# Altium PCB STN1110_RN-42.PcbDoc
Units mil, origin at the board's own origin, x right, y up, seen from the top; angles counter-clockwise.
Board outline 688.98 x 1476.57 mil, 2 copper layers (Top Layer, Bottom Layer), stack 63.4 mil thick; 32 components, 32 nets, 128 pads, 42 vias.
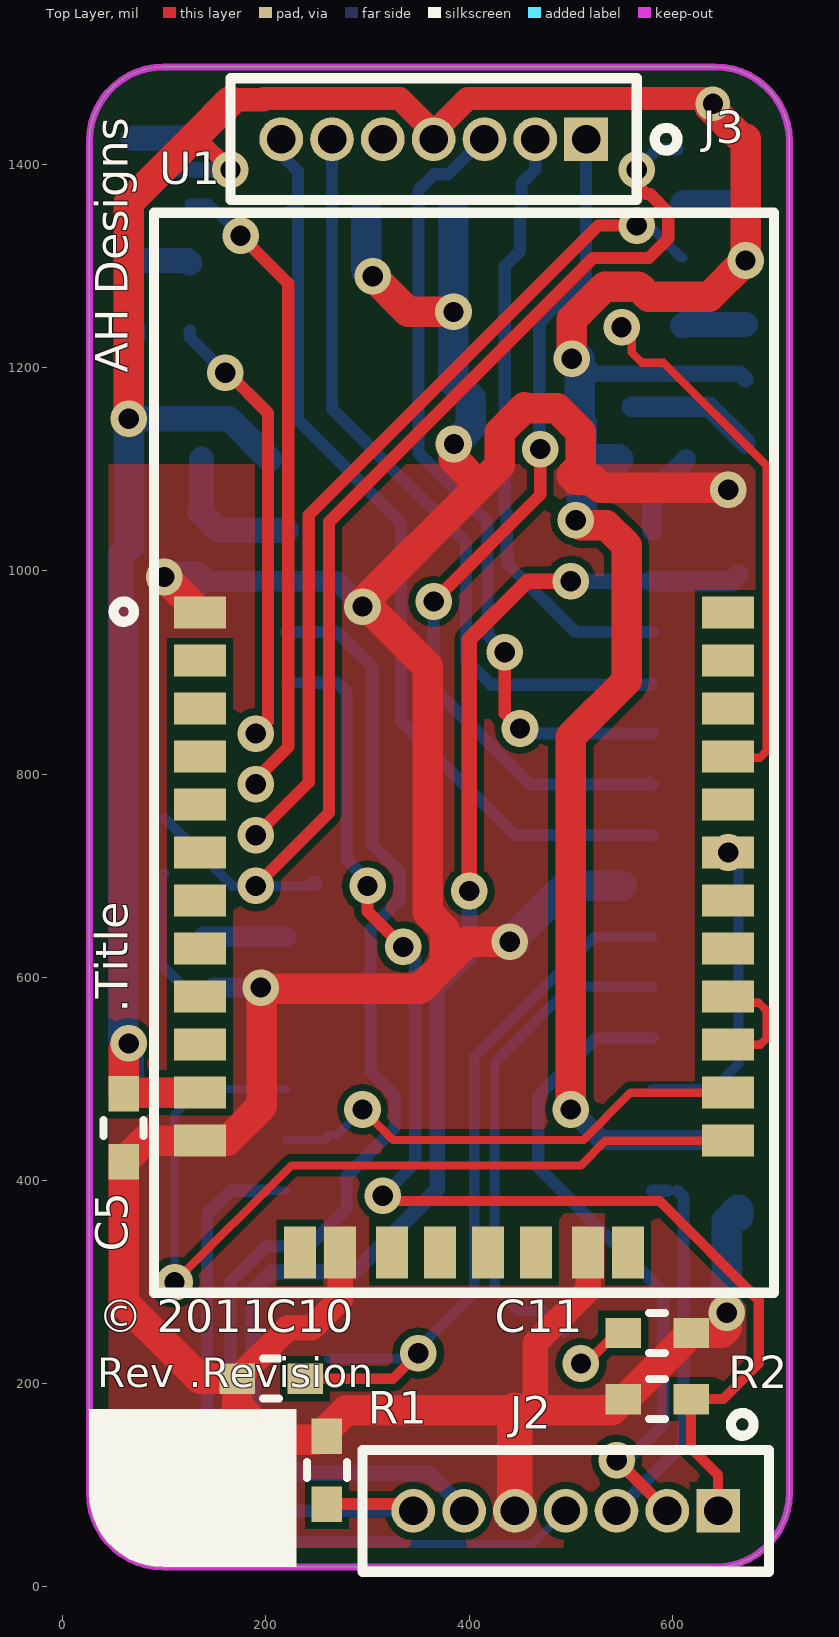
[diagram p0: Top Layer view]
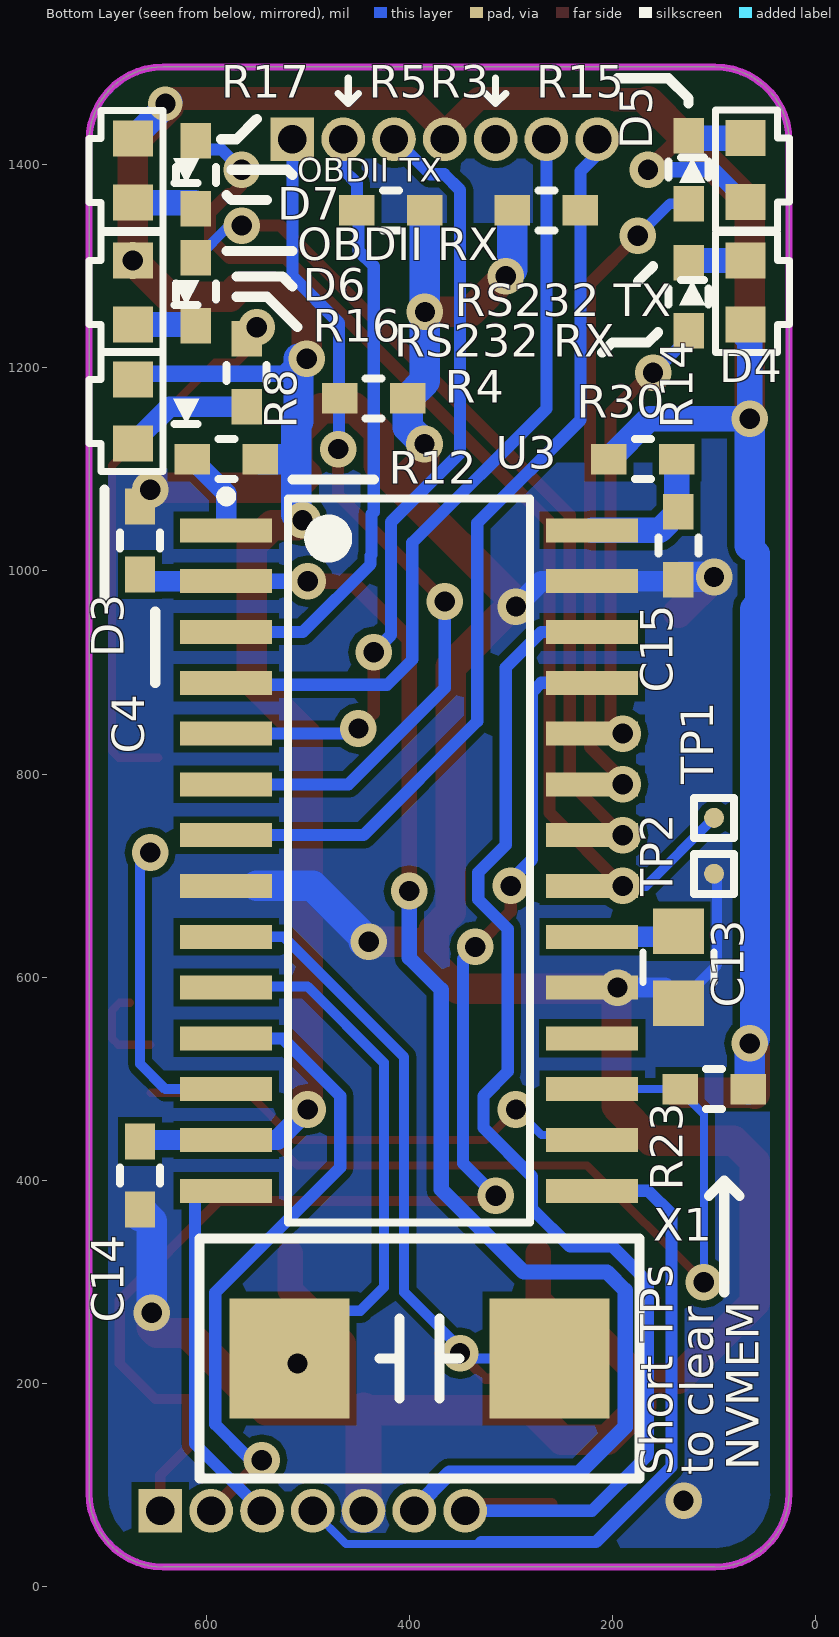
[diagram p1: Bottom Layer view, seen from below]

## Layer stack, top to bottom
Top Layer: signal copper 0.7
Dielectric: core 62, FR-408, Dk 3.81
Bottom Layer: signal copper 0.7

## Board outline
26.18,92.52 ccw(c99.11,92.52) 99.11,19.59 99.11,19.68 642.22,19.68 642.22,19.59 ccw(c642.22,92.52) 715.16,92.52 715.16,1423.23 ccw(c642.22,1423.23) 642.22,1496.16 642.22,1496.06 99.11,1496.06 ccw(c99.11,1423.13) 26.18,1423.13

## Design rules (kind name [scope] priority, off if disabled: settings)
AcuteAngle [All] p1: minimum=6.00000000000000E+0001
Clearance Clearance_outline [OnLayer('Top Layer') or OnLayer('Bottom Layer') or IsVia vs OnLayer('Keep-Out Layer')] p1: gap=15
Clearance [All] p2: gap=7
ComponentClearance [All] p1: gap=6 collisioncheckmode=3 verticalgap=6 showdistances=FALSE
ComponentOrientations [All] p1: allowedrotations=27
DiffPairsRouting [All] p1: maxlimit=10 minlimit=5 mostfreqgap=7 maxuncoupledlength=250
FabricationTestPointUsage TestPointUsage [All] p1: valid=2 allowmultiple=TRUE
FabricationTestpoint Testpoint [All] p1: side=3 testpointundercomponent=FALSE minsize=40 maxsize=100 preferedsize=60 minholesize=0 maxholesize=40 preferedholesize=32 testpointgrid=1 allowsidetop=TRUE allowsidebottom=TRUE usegrid=TRUE gridtolerance=0.01
Height [All] p1: minheight=0 maxheight=1500 prefheight=500
HoleSize [All] p1: absolutevalues=TRUE maxlimit=500 minlimit=20 maxpercent=80.000 minpercent=20.000
MinimumAnnularRing [All] p1: minimumring=7
MinimumSolderMaskSliver [All] p1: minsoldermaskwidth=4
PermittedLayers [All] p1: toplayerpermitted=TRUE bottomlayerpermitted=TRUE
PlaneConnect PlaneConnect_Vias [IsVia] p1: planeconnectstyle=Direct reliefexpansion=20 reliefentries=4 reliefconductorwidth=10 reliefairgap=10
PlaneConnect [All] p2: planeconnectstyle=Relief reliefexpansion=20 reliefentries=4 reliefconductorwidth=15 reliefairgap=15
PolygonConnect PolygonConnect_Vias [IsVia] p1: connectstyle=Direct reliefconductorwidth=10 reliefentries=4 polygonreliefangle="90 Angle"
PolygonConnect [All] p2: connectstyle=Direct reliefconductorwidth=10 reliefentries=4 polygonreliefangle="90 Angle"
RoomDefinition STN1110_RN-42 [InComponentClass('STN1110_RN-42')] p1: confinementstyle=ConfineIn formatcopy=TRUE lockcomponents=FALSE outline 15,0 725,0 725,1500 15,1500
RoutingTopology RoutingTopology_Bottom [OnLayer('Bottom Layer')] p1: topology=Vertical
RoutingTopology RoutingTopology_Mid4 [OnLayer('Mid-Layer 4')] p2: topology=Horizontal
RoutingTopology RoutingTopology_Mid3 [OnLayer('Mid-Layer 3')] p3: topology=Vertical
RoutingTopology RoutingTopology_Mid2 [OnLayer('Mid-Layer 2')] p4: topology=Horizontal
RoutingTopology RoutingTopology_Mid1 [OnLayer('Mid-Layer 1')] p5: topology=Vertical
RoutingTopology RoutingTopology_Top [OnLayer('Top Layer')] p6: topology=Horizontal
RoutingVias [All] p1: holewidth=20 width=36 viastyle="Through Hole" minholewidth=20 minwidth=34 maxholewidth=100 maxwidth=300
SilkToSilkClearance [IsText] p1: silktosilkclearance=0
SilkscreenOverComponentPads [IsText] p1: minsilkscreentomaskgap=3
SolderMaskExpansion [All] p1: expansion=3
ViasUnderSMD [All] p1: allowed=TRUE
Width [All] p1: maxlimit=150 minlimit=8 preferedwidth=12 minimp=50.000000 maximp=50.000000 favimp=50.000000
17 further rules are at their usual default settings.

## Components (designator, comment, footprint, x,y, rotation, side; value= is the part's Value field where it differs from the comment)
C4 "0.1uF" CC0603 665,1030 r270 bottom
C5 "0.1uF" CC0603 60,452 r270 top
C10 "33pF" CC0603 205,205 r0 top
C11 "33pF" CC0603 585,250 r180 top
C13 "10uF" CC0805 135,610 r270 bottom
C14 "0.1uF" CC0603 665,405 r270 bottom
C15 "0.1uF" CC0603 135,1025 r270 bottom
D3 "APA1606SECK" KINGBRIGHT_APA1606SECK 672,1157 r270 bottom
D4 "APA1606SECK" KINGBRIGHT_APA1606SECK 69,1274.08 r90 bottom
D5 "APA1606SECK" KINGBRIGHT_APA1606SECK 69,1394.5 r90 bottom
D6 "APA1606SECK" KINGBRIGHT_APA1606SECK 672,1274.08 r270 bottom
D7 "APA1606SECK" KINGBRIGHT_APA1606SECK 672,1394.08 r270 bottom
J2 "TMS-107-02-G-S" Samtec_TMS-107-02-G-S 495,75 r180 top locked
J3 "TMS-107-02-G-S" Samtec_TMS-107-02-G-S 365,1425 r180 top locked
R1 "10.0K" R0603 260,115 r90 top
R2 "10.0K" R0603 585,185 r180 top
R3 "10.0K" R0603 265,1355 r0 bottom
R4 "10.0K" R0603 435,1170 r180 bottom
R5 "10.0K" R0603 418,1355 r180 bottom
R8 "1.00K" R0603 560,1195 r270 bottom
R12 "10.0K" R0603 580,1110 r180 bottom
R14 "1.00K" R0603 125,1270 r270 bottom
R15 "1.00K" R0603 125,1395 r270 bottom
R16 "1.00K" R0603 610,1275 r90 bottom
R17 "1.00K" R0603 610,1390 r90 bottom
R23 "1.00K" R0603 100,490 r180 bottom
R30 "10.0" R0603 170,1110 r180 bottom
TP1 "Name" TP,0.5mmx0.5mm,RND 100,757 r90 bottom
TP2 "Name" TP,0.5mmx0.5mm,RND 100,702 r90 bottom
U1 "RN-42" RN-42 395,644 r0 top locked
U3 "STN1110" SOIC127P1030X264-28N 400,715 r180 bottom locked
X1 "ABM2-16.000MHZ-D4Y-T" Abracon_ABM2_Series 390,225 r180 bottom

## Footprints (in the part's own frame and the unit in brackets; to place one, negate y for a bottom-side part, rotate by r counter-clockwise, add the part's x,y. Pads: shape width x height; smd on the part's side, far side on the other; paste and mask are expansions set on the pad)
Abracon_ABM2_Series [mm] "Abracon ABM2 series crystal footprint"
  rect 3x3 smd: 1(-3.25,0) 2(3.25,0)
  silkscreen extent -5.5,-3 5.5,3, body extent -4,-2.25 4,2.25, height 1.4
CC0603 [mil] "Chip Capacitor, Body 1.6x0.8mm, IPC Medium Density"
  rect 35x30 smd: 1(-33.46,0) 2(33.46,0)
  silkscreen extent -8,-20 8,20, body extent -33,-19 33,19, height 24
CC0805 [mil] "Chip Capacitor, Body 2.0x1.3mm, IPC Medium Density"
  rect 45x50 smd: 1(-35.43,0) 2(35.43,0)
  silkscreen extent -15,-35 15,35, body extent -42,-28 42,28, height 26
KINGBRIGHT_APA1606SECK [mm] "Kingbright Right-Angle LED footprint (0605)"
  rect 0.9x1 smd: A(-0.8,0) C(0.8,0)
  silkscreen extent -1.5,-1.1 1.5,1.66, body extent -0.8,-0.9 0.8,0.3, height 0.6
R0603 [mil] "Chip Resistor, 2-Leads, Body 1.7x0.8mm, IPC High Density"
  rect 35x30 smd: 1(-33.46,0) 2(33.46,0)
  silkscreen extent -8,-20 8,20, body extent -33,-19 33,19, height 24
RN-42 [mm] "Roving Networks RN-42 module footprint"
  rect 1.3x0.8 smd: 1(-6.6,8) 2(-6.6,6.8) 3(-6.6,5.6) 4(-6.6,4.4) 5(-6.6,3.2) 6(-6.6,2) 7(-6.6,0.8) 8(-6.6,-0.4) 9(-6.6,-1.6) 10(-6.6,-2.8) 11(-6.6,-4) 12(-6.6,-5.2) 13(6.6,-5.2) 14(6.6,-4) 15(6.6,-2.8) 16(6.6,-1.6) 17(6.6,-0.4) 18(6.6,0.8) 19(6.6,2) 20(6.6,3.2) 21(6.6,4.4) 22(6.6,5.6) 23(6.6,6.8) 24(6.6,8)
  rect 0.8x1.3 smd: 28(3.1,-8) 29(-3.1,-8) 30(4.1,-8) 31(1.8,-8) 32(0.6,-8) 33(-0.6,-8) 34(-1.8,-8) 35(-4.1,-8)
  Top Layer pour cut-out: 6.75,11.75 6.75,17.75 -6.75,17.75 -6.75,11.75
  Bottom Layer pour cut-out: 6.75,11.75 6.75,17.75 -6.75,17.75 -6.75,11.75
  silkscreen extent -8.76,-9 7.75,18, body extent -6.96,-8.36 6.96,17.6, height 2
Samtec_TMS-107-02-G-S [mil] "CONN HEADER .050\" 7POS PCB GOLD"
  rect 43x43 hole 28: 1(-150,0)
  round 43 hole 28: 2(-100,0) 3(-50,0) 4(0,0) 5(50,0) 6(100,0) 7(150,0)
  silkscreen extent -200,-96 200,60, body extent -182,-44 182,44, height 205
SOIC127P1030X264-28N [mm] "SOIC, 28-Leads, Body 18.1x7.6mm (max), Pitch 1.27mm, IPC Medium Density"
  rect 2.3x0.6 smd: 1(-4.575,8.255) 2(-4.575,6.985) 3(-4.575,5.715) 4(-4.575,4.445) 5(-4.575,3.175) 6(-4.575,1.905) 7(-4.575,0.635) 8(-4.575,-0.635) 9(-4.575,-1.905) 10(-4.575,-3.175) 11(-4.575,-4.445) 12(-4.575,-5.715) 13(-4.575,-6.985) 14(-4.575,-8.255) 15(4.575,-8.255) 16(4.575,-6.985) 17(4.575,-5.715) 18(4.575,-4.445) 19(4.575,-3.175) 20(4.575,-1.905) 21(4.575,-0.635) 22(4.575,0.635) 23(4.575,1.905) 24(4.575,3.175) 25(4.575,4.445) 26(4.575,5.715) 27(4.575,6.985) 28(4.575,8.255)
  silkscreen extent -4.7,-9.05 3.03,9.23, body extent -3.79,-9.04 3.8,9.04, height 2.64
TP,0.5mmx0.5mm,RND [mm] "0.5x0.5 SMT test point."
  round 0.5 smd: 1(0,0)
  silkscreen extent -0.5,-0.5 0.5,0.5, body extent -0.5,-0.5 0.5,0.5, height 5

## Part data
C4 C5 C14 C15: library part 0.1uF,50V,CC0603,X7R,+/-20%, "0.1uF 50V, in a CC0603, X7R ,+/-20%,LF"
C10 C11: library part 33pF,16V,CC0603,COG,+/-1%, "33pF 16V, in a CC0603, COG ,+/-1%,LF"
C13: library part 10uF,6.3V,CC0805,X5R,+/-20%, "10uF 6.3V, in a CC0805, X5R ,+/-20%,LF"
D3 D4 D5 D6 D7: library part KINGBRIGHT_APA1606SECK, "LED 1.6X0.6MM 601NM Orange Right-Angle SMD"
J2 J3: library part Samtec_TMS-107-02-G-S, "7 pin through hole micro header, 50mil pitch"
R1 R2 R3 R4 R5 R12: library part 10.0K,R0603,1%, "10.0K, Gen Purp Chip, R0603 0.1W 1%"
R8 R23: library part 1.00K,R0603,1%, "1.00K, Gen Purp Chip, R0603 0.1W 1%"
R14 R15 R16 R17: library part 1.00k,R0603,1%, "1.00K, Gen Purp Chip, R0603 0.1W 1%"
R30: library part 10.0,R0603,1%, "10.0, Gen Purp Chip, R0603 0.1W 1%"
TP1 TP2: library part "TP, 0.5mm x 0.5mm SMT, RND", "0.5mm diameter testpoint"
U1: "Roving Networks Bluetooth Serial Module"
U3: library part STN1110_SOIC, "ELM327 Improved Replacement; Multiprotocol OBDII Scanner"
X1: "CRYSTAL 16.00 MHZ 18PF SMD"

## Via types
v1: diameter 36, hole 20, Top Layer to Bottom Layer, tented both sides, 41 vias
v2: diameter 34, hole 20, Top Layer to Bottom Layer, tented both sides, 1 vias

## Nets (pads, with @x,y where several pads share a name; then routed paths per layer and width w, separated by ;. In a path a pad name is that pad's centre, name@x,y a point inside that pad or via, vN(x,y) a via of type N, cw(c..) or ccw(c..) an arc to the next point about the centre after c; other vN are vias at no path point)
+3.3V: C5.1 C14.1 D3.A D4.A D5.A D6.A D7.A J3.4 R12.2 R23.2 R30.1 U1.11 U3.13 | length 3735.6
  Top Layer w15: 131.22,1428.78 v1(165,1395)
  Top Layer w23: 163.75,1463.81 197.24,1463.81 198.43,1465 331.57,1465 J3.4@365,1431.57 ; J3.4 J3.4@365,1431.57 ; v2(639.94,1459.97) 634.91,1465 398.43,1465 J3.4@365,1431.57
  Top Layer w25: 163.75,1463.81 165,1465.06 ; J3.4 J3.4@365,1430.86
  Top Layer w30: v1(65,535) 60,530 C5.1 61.06,486.52 U1.11 ; v1(65,1150) 65,1362.56 131.22,1428.78 165,1462.56 ; v1(500,470) 500,837.02 555,892.02 555,1025 535,1045 v1@510,1045 ; v1(501.01,1208.99) 501.01,1247.58 533.43,1280 566.57,1280 576.57,1270 636.43,1270 v1(672,1305.57) 672,1425.57 ; v2@636.87,1456.89 668.18,1425.57
  Bottom Layer w15: D5.A 100.99,1395 v1(165,1395)
  Bottom Layer w16: v1@509,1208.99 523.96,1194.04 666.46,1194.04 D3.A
  Bottom Layer w20: v1(500,470) 530,440 U3.13 ; U3.13@550,440 U3.13 ; C14.1 663.46,440 U3.13
  Bottom Layer w25: 59.68,960 57.18,962.5 57.18,1017.18 65,1025 ; D4.A@69,1231.04 69,1238.58 65,1238.58 v1(65,1150) 163.46,1150 R30.1 ; v2@635.79,1461.79 v2@637.61,1459.97 ; v2(639.94,1459.97) v2@637.61,1459.97 ; D7.A v2@637.61,1459.97
  Bottom Layer w30: 59.68,962.5 59.68,960 59.68,540.32 v1(65,535) 65,491.54 R23.2 ; 65,1025 v1(65,1150) ; 509,1147.54 v1@509,1208.99 ; v1@511,1056 511,1145.54 ; 516,1110 R12.2
  other v1: 505,1050
ANALOG_IN: C4.2 J2.6 U3.2 | length 1450.5
  Top Layer w15: v1(400,685) 400,932.38 457.62,990 v1(500,990)
  Bottom Layer w15: J2.6@398.5,78.5 J2.6 395,77.33 360.33,112 233,112 187.49,157.51 187.49,292.09 205.41,310 287.38,310 368.5,391.12 368.5,587.84 400,619.34 v1(400,685) ; v1(500,990) U3.2
  Bottom Layer w20: U3.2 658.46,990 C4.2
CAN_RX: J2.3 U3.14 | length 359.7
  Bottom Layer w12: J2.3 611.01,141.01 611.01,383.99 U3.14@605,390 ; U3.14 U3.14@595,390
CAN_TX: J2.4 U3.15 | length 733.4
  Bottom Layer w8: U3.15@200,390 U3.15 ; 329.15,42.18 462.19,42.18 J2.4
  Bottom Layer w12: U3.15@200,390 165,390 142,367 142,118.25 216.07,44.18 329.15,44.18
CONNECT: R8.1 U1.21 | length 537.4
  Top Layer w8: v1(550,1240) 560,1230 560,1215 570,1205 591.33,1205 692.66,1103.68 692.66,822.66 686.23,816.23 U1.21@646.84,816.23
GND: C4.1 C5.2 C10.1 C11.1 C13.2 C14.2 C15.2 J2.5 R1.2 R2.2 R3.2 R4.2 R5.2 TP2.1 U1.1 U1.12 U1.28 U1.29 U3.8 U3.19 U3.27 | length 3968.3
  Top Layer w20: C10.1@170,203.46 C10.1
  Top Layer w25: C10.1 221.54,255 245,255 272.95,282.95 U1.29 ; 465,174 465,240 517.05,292.05 U1.28
  Top Layer w30: v1(100,994.12) U1.1 ; v1(295,965) 295,969 410.5,1084.5 ; v1@300,965 359,906 359,663.98 376,646.98 376,613.02 ; v1(305,1290) 340,1255 v1(384.54,1255) ; v1(385,1125) 385,1110 410.5,1084.5 ; v1(440,635) 397.98,635 376,613.02 ; v1(653.46,270) 653.46,255 648.46,250 C11.1 553.46,185 R2.2 540.54,174 465,174 445,174 279,174 250,145 205,145 171.54,178.46 C10.1 135,205 60,280 C5.2 80.74,439.28 U1.12 161.78,439.28 196,473.5 196,589 351.98,589 376,613.02 ; v1(655,1080) 653,1082 529.57,1082 521.57,1090 505,1090 500.78,1094.22 510,1103.43 510,1136.57 486.57,1160 455.43,1160 454.43,1161 430,1136.57 430,1104 410.5,1084.5
  Top Layer w35: J2.5 445,174
  Bottom Layer w10: TP2.1 97,699 97,612.57 C13.2
  Bottom Layer w20: C13.2@135,576.54 148.46,590 v1(195,590) U3.19 ; C15.2 136.54,990 U3.27 270,990 v1(295,965)
  Bottom Layer w30: v1(100,994.12) 132.42,994.12 C15.2 ; R3.2 298.46,1296.54 v1(305,1290) ; R5.2 v1(384.54,1255) 384.54,1187 R4.2 401.54,1141.54 v1(385,1125) ; v1@445,635 445,640 495,690 U3.8@550,690 ; v1(653.46,270) 653.46,360 C14.2 C14.2@665,365
  other v1: 130,85
ISO_K_TX#: J2.1 R2.1 U3.25 | length 1269.8
  Top Layer w10: v1@315,380 587.31,380 685,282.31 685,220 650,185 R2.1 618.46,136.54 645,110 J2.1
  Top Layer w12: v1(300,690) 300,665 v1(335,630)
  Bottom Layer w10: U3.25 U3.25@245,890
  Bottom Layer w12: U3.25@245,890 270,890 279.16,880.84 279.16,716.1 v1@300,695.25 ; v1(315,385) 347,417 347,618 v1(335,630)
ISO_L_TX#: J2.7 R1.1 U3.26 | length 1296.9
  Top Layer w12: R1.1 338.46,81.54 J2.7
  Bottom Layer w8: U3.26 U3.26@224.88,935
  Bottom Layer w12: U3.26 270,940 305,905 305,730.25 332,703.25 332,676.75 303,647.75 303,507.25 327,483.25 327,452 279.16,404.16 279.16,372.39 241.77,335 200,335 165,300 165,130 220,75 J2.7
ISO_RX#: J2.2 U3.11 | length 641
  Top Layer w12: v1(545.2,124.8) 545.2,125 595,75.2 J2.2
  Bottom Layer w12: v1(545.2,124.8) 555.66,124.8 591.01,160.15 591.01,289.85 468,412.86 468,483.25 524.75,540 U3.11
J1850_BUS+_TX: J3.1 R4.1 U3.6 | length 860.4
  Top Layer w12: v1(365,970) 470,1075 v1(470,1120)
  Bottom Layer w12: v1(365,970) 365,884.75 459.75,790 U3.6 U3.6@578.12,792 ; v1(470,1120) 469.01,1120.99 469.01,1244.01 515,1290 J3.1
J1850_BUS-_TX#: J3.7 R3.1 U3.7 | length 921.9
  Bottom Layer w12: J3.7 215,1410 231.54,1393.46 R3.1 ; R3.1@225,1355 R3.1 ; U3.7 445,740 333,852 333,1047.25 231.54,1148.72 R3.1
NetC13_1: C13.1 U3.20 | length 86.3
  Bottom Layer w10: C13.1@135,643.46 C13.1@138.46,640
  Bottom Layer w20: C13.1@138.46,640 U3.20
NetC15_1: C15.1 R30.2 U3.28 | length 144.7
  Bottom Layer w25: R30.2 136.54,1060 C15.1 153.46,1040 U3.28
NetD3_C: D3.C R8.2 | length 126.9
  Bottom Layer w20: R8.2 635.97,1161.54 D3.C
NetD4_C: D4.C R14.1 | length 56.9
  Bottom Layer w25: D4.C 122.89,1305.58 R14.1
NetD5_C: D5.C R15.1 | length 57
  Bottom Layer w25: D5.C 122.54,1426 R15.1
NetD6_C: D6.C R16.1 | length 62.4
  Bottom Layer w25: R16.1 611.05,1242.58 D6.C
NetD7_C: D7.C R17.1 | length 62.4
  Bottom Layer w25: R17.1@610,1361.54 611.05,1362.58 D7.C
NetR12_1: R12.1 U3.1 | length 83.8
  Bottom Layer w20: U3.1 580.12,1076.65 R12.1
NetR14_2: R14.2 U3.24 | length 444.5
  Top Layer w12: v1(160,1195) v1@160,1197.56 ; v1(190,840) 202,852 202,1155.56 v1@160,1197.56 ; v1@160,1197.56 159.23,1198.32 159.23,1200 160,1200 v1@160,1197.56
  Bottom Layer w12: R14.2 125,1230 v1(160,1195)
NetR15_2: R15.2 U3.23 | length 635.8
  Top Layer w12: v1(175,1330) 222,1283 222,826.75 190,794.75 v1(190,790)
  Bottom Layer w10: R15.2 143.46,1361.54 v1(175,1330)
NetR16_2: R16.2 U3.22 | length 835.7
  Top Layer w12: v1(190,740) 242,792 242,1055.04 526.96,1340 v1(565,1340)
  Bottom Layer w10: v1(565,1340) 577.06,1340 608.6,1308.46 R16.2
NetR17_2: R17.2 TP1.1 U3.21 | length 1161.5
  Top Layer w12: v1(190,690) 262,762 262,1048.17 521.83,1308 576.84,1308 596,1327.16 596,1352.84 577.84,1371 574,1371 565,1380 v1(565,1395)
  Bottom Layer w10: TP1.1 167,690 v1(190,690) U3.21 U3.21@245,690 ; U3.21@245,690 245,695 250,695 250,690 U3.21@245,690
  Bottom Layer w12: v1(565,1395) 585,1415 R17.2@605,1415
NetU1_15: U1.15 U1.16 | length 88.6
  Top Layer w8: U1.15 686.42,533.76 692.66,540 692.66,567.34 685,575 U1.16@675,575
OSC1: C10.2 U3.9 X1.2 | length 752.4
  Top Layer w10: C10.2 325,205 v1(350,230)
  Bottom Layer w10: X1.2 340,225 v1@345,230 ; v1(350,230) v1@345,230 ; U3.9 523.54,640 405,521.46 405,290 v1@345,230
OSC2: C11.2 U3.10 X1.1 | length 548.9
  Top Layer w10: v1(510,220) 515,220 545,250 C11.2
  Bottom Layer w10: X1.1@493.74,250 471.87,271.87 448.13,271.87 425,295 425,516 500,591 579.12,591 U3.10
PWM/VPW#: J3.2 R5.1 U3.3 | length 601.7
  Bottom Layer w12: J3.2 465,1395 451.46,1381.46 R5.1 450,1353.54 450,1315 435,1300 435,1058.03 437,1056.03 437,1016 438,1015 438,1006.75 504.75,940 U3.3
PWM_RX: J3.3 U3.5 | length 789.3
  Top Layer w12: v1(435,920) 435,860 v1(450,845)
  Bottom Layer w12: J3.3 413.79,1425 379.29,1390.5 365.5,1390.5 350,1375 350,1116.16 418,1048.16 418,937 v1(435,920) ; v1(450,845) 455,840 U3.5
SLEEP#: U1.19 U3.12 | length 311.7
  Top Layer w10: U1.19 v1(655,722.9)
  Bottom Layer w10: U3.12 640,490 665,515 665,715 655,725 v1(655,722.9)
UART_RX: U1.14 U3.16 | length 477
  Top Layer w8: v1(295,470) 325,440 512.43,440 558.95,486.52 U1.14
  Bottom Layer w8: U3.16 U3.16@260,440 ; U3.16@260,445 270,445 v1(295,470)
UART_TX: R23.1 U1.13 U3.17 | length 887.8
  Top Layer w8: v1(110,300) 225,415 510.05,415 534.33,439.28 U1.13
  Bottom Layer w8: v1(110,300) 110,465 135,490 U3.17
VPW_RX#: J3.6 U3.4 | length 761.1
  Bottom Layer w10: U3.4@579.12,889 U3.4
  Bottom Layer w12: J3.6 265,1159.75 397,1027.75 397,912.75 421.75,888 578.12,888 U3.4@579.12,889
pads on no net: J3.5 U1.2 U1.3 U1.4 U1.5 U1.6 U1.7 U1.8 U1.9 U1.10 U1.17 U1.18 U1.20 U1.22 U1.23 U1.24 U1.30 U1.31 U1.32 U1.33 U1.34 U1.35 U3.18

## Polygon pours and split planes (outlines as drawn)
GND on Bottom Layer "GND2" (solid, remove dead copper, pour order 1004): 26.18,92.52 26.18,1423.13 cw(c99.11,1423.13) 99.11,1496.06 642.32,1496.06 cw(c642.32,1423.23) 715.16,1423.23 715.16,92.52 cw(c642.22,92.52) 642.22,19.59 99.11,19.59 cw(c99.11,92.52) 26.18,92.52
GND on Top Layer "GND1" (solid, remove dead copper, pour order 1003): 26.18,92.52 26.18,1423.13 cw(c99.11,1423.13) 99.11,1496.06 642.32,1496.06 cw(c642.32,1423.23) 715.16,1423.23 715.16,92.52 cw(c642.22,92.52) 642.22,19.59 99.11,19.59 cw(c99.11,92.52) 26.18,92.52

## Keep-outs
Keep-Out Layer:
  lines w7: 99.11,19.59 cw(c99.11,92.52) 26.18,92.52 26.18,1423.13 cw(c99.11,1423.13) 99.11,1496.06 642.22,1496.06 ; 99.11,19.68 642.22,19.68 ; 642.22,19.59 ccw(c642.22,92.52) 715.16,92.52 715.16,1423.23 ccw(c642.22,1423.23) 642.22,1496.16

## Other copper
Top Layer:
  pour cut-out: 715.16,1105 715,1105.16 715,1365 675,1405 26.18,1405 26.18,1105

## Silkscreen, mask and mechanical layers (free items; w line width, h text height)
Top Overlay:
  region: 230,19.68 99.02,19.68 cw(c99.02,92.52) 26.18,92.52 26.18,173.82 ccw(c25,173.82) 25,175 230,175
  text "AH Designs" at 75,1195 h55 r90
  text ".Title" at 75,565 h55 r90
  text "© 2011" at 35,240 h55
  text "Rev" at 34,187 h50
  text ".Revision" at 124,187 h50
Bottom Overlay:
  lines w7: 305,1470 315,1460 ; 315,1485 315,1460 ; 325,1470 315,1460 ; 450,1470 460,1460 ; 460,1485 460,1460 ; 470,1470 460,1460
  lines w10: 75,385 90,400 ; 90,290 90,400 ; 105,385 90,400 ; 125,1460 125,1465 145,1485 195,1485 ; 155,1235 165,1225 200,1225 210,1215 ; 160,1300 170,1290 175,1285 ; 435,1090 515,1090 ; 510,1240 540,1270 570,1270 ; 515,1280 525,1290 570,1290 ; 515,1315 580,1315 ; 515,1390 520,1395 575,1395 ; 540,1365 575,1365 580,1370 ; 550,1445 570,1425 585,1425 ; 650,890 650,960 ; 700,975 700,1080
  text "OBDII TX" at 510,1375 h40
  text "OBDII RX" at 510,1295 h55
  text "RS232 TX" at 355,1240 h55
  text "RS232 RX" at 415,1200 h55
  text "NVMEM" at 45,115 h55 r270
  text "to clear" at 90,110 h55 r270
  text "Short TPs" at 130,110 h55 r270
Assy Dwg Bot:
  text "Place Top Assembly Instructions Here" at -1225,-1525 h250
  text ".AssemblyPartNumber" at 23543.67,-3086.77 h100
  text "1" at 24520,-3246.77 h60
  text "2" at 24860,-3246.77 h60
  text "Assembly Drawing (TOP BOARD)" at 21900,-3275 h100
Mechanical 3:
  text ".AssemblyPartNumber" at -4969.45,-3039.01 h100
  text "2" at -5750,-3250 h100
  text "Assembly Drawing (BOT BOARD)" at -3039.45,-3269.01 h100
Mechanical 4:
  text "Creative Commons Attribution 3.0 Unported (CC BY 3.0)" at -51,3282 h60
  text "You are free:" at -51,3142 h60
  text "to Share — to copy, distribute and transmit the work" at -51,3002 h60
  text "to Remix — to adapt the work" at -51,2932 h60
  text "to make commercial use of the work" at -51,2862 h60
  text "Under the following conditions:" at -51,2722 h60
  text "Attribution — You must attribute OBDII Bluetooth Module to Andrew Honecker (with link)." at -51,2582 h60
  text "Attribute this work:" at -51,2442 h60
  text "<div xmlns:cc=\"http://creativecommons.org/ns#\" xmlns:dct=\"http://purl.org/dc/terms/\" about=\"http://creativecommons.org/choose/results-one?q_1=2&q_1=1&field_commercial=y&field_derivatives=y&field_jurisdiction=&field_format=&field_worktitle=OBDII+Bluetooth+Module&field_attribute_to_name=Andrew+Honecker&field_attribute_to_url=http%3A%2F%2Fbatman.homelinux.com%2Fblog%2F%3Fpage_id%3D99&field_sourceurl=&field_morepermissionsurl=&lang=en_US&n_questions=3\"><span property=\"dct:title\">OBDII Bluetooth Module</span> (<a rel=\"cc:attributionURL\" property=\"cc:attributionName\" href=\"http://batman.homelinux.com/blog/?page_id=99\">Andrew Honecker</a>) / <a rel=\"license\" href=\"http://creativecommons.org/licenses/by/3.0/\">CC BY 3.0</a></div>" at -51,2302 h60
  text "With the understanding that:" at -51,2162 h60
  text "Waiver — Any of the above conditions can be waived if you get permission from the copyright holder." at -51,2022 h60
  text "Public Domain — Where the work or any of its elements is in the public domain under applicable law, that status is in no way affected by the license." at -51,1952 h60
  text "Other Rights — In no way are any of the following rights affected by the license:" at -51,1882 h60
  text "Your fair dealing or fair use rights, or other applicable copyright exceptions and limitations;" at -51,1812 h60
  text "The author's moral rights;" at -51,1742 h60
  text "Rights other persons may have either in the work itself or in how the work is used, such as publicity or privacy rights." at -51,1672 h60
  text "Notice — For any reuse or distribution, you must make clear to others the license terms of this work. The best way to do this is with a link to this web page." at -51,1602 h60
Title Block Bottom:
  lines w5: -6600,1400 -6300,1400 ; -6600,6400 -6300,6400 ; -6600,11400 -6300,11400 ; -6300,-2100 -6300,-3300 ; -2600,-3600 -2600,-3300 ; -2600,16100 -2600,16400 ; -400,-3300 -1800,-3300 -6300,-3300 ; 1400,-3600 1400,-3300 ; 1400,16100 1400,16400 ; 5400,-3600 5400,-3300 ; 5400,16100 5400,16400 ; 9400,-3600 9400,-3300 ; 9400,16100 9400,16400 ; 13400,-3600 13400,-3300 ; 13400,16100 13400,16400 ; 17400,-3600 17400,-3300 ; 17400,16100 17400,16400 ; 21400,-3600 21400,-3300 ; 21400,16100 21400,16400 ; 25100,1400 25400,1400 ; 25100,11400 25400,11400 ; -6300,-3300 25100,-3300 25100,16100 -6300,16100 -6300,-3300 ; -6600,-3600 25400,-3600 25400,16400 -6600,16400 -6600,-3600
  lines w9.82: -6300,-3140 -4620.92,-3140 ; -6300,-2855.85 -4620.92,-2855.85 -2941.83,-2855.85 ; -6300,-2689.29 -4620.92,-2689.29 ; -6300,-2532.52 -2941.83,-2532.52 ; -6298.17,-2035.88 -2940,-2035.88 ; -6298.17,-1614.56 -2940,-1614.56 ; -6298.17,-1565.57 -2940,-1565.57 ; -6298.17,-1428.39 -2940,-1428.39 ; -6064.34,-3140 -6064.34,-2855.85 ; -5337.72,-3296.77 -5337.72,-3140 ; -5098.64,-1732.14 -4145,-1732.14 ; -4630.74,-2689.29 -2941.83,-2689.29 ; -4624.45,-2035.88 -4620.92,-2039.41 -4620.92,-2365.95 -4620.92,-3296.77 ; -4619.08,-2369.01 -2940,-2369.01 ; -4619.08,-2202.45 -2940,-2202.45 ; -500,-3300 -500,-740.95
  lines w10: -2949.65,-2689.29 -753.67,-2689.29 -753.67,-3296.77 ; -2940,-3296.77 -2940,-1428.39 ; -2940,-3166.77 -753.67,-3166.77 ; -1057.5,-3166.77 -1057.5,-2689.29
  lines w15: -6300,-740.95 25100,-740.95 ; -500,-2630.71 20178.74,-2630.71 25100,-2630.71 ; -500,-1250.39 20178.74,-1250.39 ; 20178.74,-3300 20178.74,-741 ; 20178.74,-2158.27 25100,-2158.27 ; 20966.14,-2630.71 20966.14,-741 ; 21928.74,-2630.71 21928.74,-741 ; 24430.71,-2630.71 24430.71,-741
  text "8" at -4566.34,16210 h70
  text "7" at -571.34,16210 h70
  text "6" at 3430.32,16210 h70
  text "5" at 7428.66,16210 h70
  text "4" at 11426.99,16210 h70
  text "3" at 15428,16210 h70
  text "2" at 19423,16210 h70
  text "1" at 23418,16210 h70
  text "A" at -6425,13812 h70
  text "A" at 25275,13512 h70
  text "B" at -6425,8812 h70
  text "C" at -6425,3812 h70
  text "C" at 25275,3512 h70
  text "NOTATIONS" at 12225,-1150 h500
  text "D" at -6425,-1188 h70
  text "D" at 25275,-1188 h70
  text "THIS DRAWING CREATES THE -001 PRINTED CIRCUIT BOARD" at -2996.33,-1268.53 h100
  text "PARTS LIST FILE NAME:" at -3000,-1525 h66.53
  text "Place Bottom Assembly Instructions Here" at 20075,-1575 h250
  text "PROPRIETARY NOTICE" at -4150,-1725 h95.04
  text ".CustomerName" at -5044.45,-1839.01 h66.53
  text "THIS DATA AND INFORMATION DISCLOSED IS PROPRIETARY DATA OF" at -2984.45,-1839.01 h66.53
  text "NEITHER THIS DATA NOR THE DATA CONTAINED HEREIN SHALL BE REPRODUCED, USED OR DISCLOSED" at -2984.45,-1919.01 h66.53
  text ".CustomerName" at -4684.45,-1999.01 h66.53
  text "TO OTHERS WITHOUT THE WRITTEN AUTHORIZATION OF" at -2984.45,-1999.01 h66.53
  text "XXX" at 20878.74,-2047.24 h150
  text "XX/XX/XXXX" at 21823.74,-2047.24 h150
  text "Preliminary Revision" at 24378.74,-2047.24 h150
  text "A.1" at 24828.74,-2047.24 h150
  text "ENGINEER:" at -2954.45,-2099.01 h75
  text ".PCBDesigner" at -3444.45,-2163.94 h100
  text "DATE:" at -2954.45,-2274.01 h75
  text ".PCBDrawingDate" at -3444.45,-2313.94 h100
  text ".CustomerName" at -4804.45,-2359.01 h200
  text "REVIEWER:" at -2954.45,-2429.01 h75
  text "AUTHOR" at 20928.74,-2447.24 h180
  text "DESCRIPTION" at 23628.74,-2447.24 h180
  text "REV." at 24928.74,-2447.24 h180
  text "DATE" at 21748.74,-2472.24 h180
  text ".PCBReviewer" at -3444.45,-2479.01 h100
  text "S/N:" at -4634.45,-2599.01 h75
  text "DATE:" at -2954.45,-2599.01 h75
  text ".PCBPartNumber" at -4944.45,-2639.01 h100
  text ".PCBReviewDate" at -3444.45,-2639.01 h100
  text "MODEL:" at -2950,-2750 h66.53
  text "+" at -1981.17,-2786.79 h40
  text ".Project" at -3444.45,-2801.77 h100
  text "TOLERANCES:" at -1090,-2805.27 h40
  text "SIZE" at -843.5,-2805.27 h40
  text ".01" at -2106.17,-2811.79 h40
  text ".XX= _" at -1756.17,-2811.79 h40
  text "SEE CHART" at -2401.17,-2846.79 h40
  text "REV:" at -6100,-2925 h66.53
  text "DWG NO:" at -4650,-2925 h66.53
  text "TITLE:" at -2950,-2925 h66.53
  text "+" at -1981.17,-2936.79 h40
  text ".005" at -2081.17,-2961.79 h40
  text ".XXX= _" at -1706.17,-2961.79 h40
  text "FOR HOLE" at -2426.17,-2971.79 h40
  text ".Title1" at -3450.02,-2979.01 h100
  text "D" at -868.5,-3055.27 h125
  text ".Revision" at -6114.45,-3059.01 h100
  text "REVISION HISTORY" at 24824.41,-3063.78 h500
  text ".Title2" at -3450.02,-3076.77 h100
  text "+" at -1981.17,-3086.79 h40
  text "TO QUERY PLEASE CONTACT:" at 20118.9,-3095.67 h250
  text "TOLERANCE" at -2401.17,-3096.79 h40
  text ".PCBDesignerContact" at 16600,-3100 h250
  text ".0005" at -2076.17,-3111.79 h40
  text ".XXXX= _" at -1656.17,-3111.79 h40
  text ".Title3" at -3450.02,-3171.77 h100
  text "CAGE" at -4650,-3200 h66.53
  text "2" at -6060,-3246.77 h60
  text "F" at -5928.56,-3249.87 h95.04
  text "O" at -5859.97,-3249.87 h95.04
  text "SHEET" at -5400,-3250 h95.04
  text "SCALE:" at -1618.5,-3265.27 h40
  text "1 : 1" at -2092.5,-3269.27 h75
  text "CODE" at -4650,-3275 h66.53
  text "NOTE: Sheet 1 contains original signatures only." at -2955,-3381.77 h100
  text "8" at -4566.34,-3485 h70
  text "7" at -571.34,-3485 h70
  text "6" at 3430.32,-3485 h70
  text "5" at 7428.66,-3485 h70
  text "4" at 11426.99,-3485 h70
  text "3" at 15428,-3485 h70
  text "2" at 19423,-3485 h70
  text "1" at 23418,-3485 h70
Title Block Top:
  lines w5: -6600,1400 -6300,1400 ; -6600,6400 -6300,6400 ; -6600,11400 -6300,11400 ; -2600,-3600 -2600,-3300 ; -2600,16100 -2600,16400 ; 1400,-3600 1400,-3300 ; 1400,16100 1400,16400 ; 5400,-3600 5400,-3300 ; 5400,16100 5400,16400 ; 9400,-3600 9400,-3300 ; 9400,16100 9400,16400 ; 13400,-3600 13400,-3300 ; 13400,16100 13400,16400 ; 17400,-3600 17400,-3300 ; 17400,16100 17400,16400 ; 19200,-3300 20600,-3300 25100,-3300 ; 21400,-3600 21400,-3300 ; 21400,16100 21400,16400 ; 25100,-2100 25100,-3300 ; 25100,1400 25400,1400 ; 25100,6400 25400,6400 ; 25100,11400 25400,11400 ; 25100,-3300 -6300,-3300 -6300,16100 25100,16100 25100,-3300 ; -6600,-3600 25400,-3600 25400,16400 -6600,16400 -6600,-3600
  lines w9.82: 19300,-3300 19300,-740.95 ; 21740,-2369.01 23419.08,-2369.01 ; 21740,-2202.45 23419.08,-2202.45 ; 21740,-2035.88 25098.17,-2035.88 ; 21740,-1614.56 25098.17,-1614.56 ; 21740,-1565.57 25098.17,-1565.57 ; 21740,-1428.39 25098.17,-1428.39 ; 21741.83,-2855.85 23420.92,-2855.85 25100,-2855.85 ; 21741.83,-2689.29 23430.74,-2689.29 ; 21741.83,-2532.52 25100,-2532.52 ; 22945,-1732.14 23898.64,-1732.14 ; 23420.92,-3296.77 23420.92,-2365.95 23420.92,-2039.41 23424.45,-2035.88 ; 23420.92,-3140 25100,-3140 ; 23420.92,-2689.29 25100,-2689.29 ; 24137.72,-3296.77 24137.72,-3140 ; 24864.34,-3140 24864.34,-2855.85
  lines w10: 19553.67,-3296.77 19553.67,-2689.29 21749.65,-2689.29 ; 19553.67,-3166.77 21740,-3166.77 ; 19857.5,-3166.77 19857.5,-2689.29 ; 21740,-3296.77 21740,-1428.39
  lines w15: -6300,-2630.71 -1378.74,-2630.71 19300,-2630.71 ; -6300,-2158.27 -1378.74,-2158.27 ; -6300,-740.95 25100,-740.95 ; -5630.71,-2630.71 -5630.71,-741 ; -3128.74,-2630.71 -3128.74,-741 ; -2166.14,-2630.71 -2166.14,-741 ; -1378.74,-3300 -1378.74,-741 ; -1378.74,-1250.39 19300,-1250.39
  text "1" at -4618,16210 h70
  text "2" at -623,16210 h70
  text "3" at 3372,16210 h70
  text "4" at 7373.01,16210 h70
  text "5" at 11371.34,16210 h70
  text "6" at 15369.68,16210 h70
  text "7" at 19371.34,16210 h70
  text "8" at 23366.34,16210 h70
  text "A" at 25225,13812 h70
  text "A" at -6475,13512 h70
  text "B" at 25225,8812 h70
  text "B" at -6475,8512 h70
  text "C" at 25225,3812 h70
  text "C" at -6475,3512 h70
  text "NOTATIONS" at 6575,-1150 h500
  text "D" at -6475,-1188 h70
  text "D" at 25225,-1188 h70
  text "THIS DRAWING CREATES THE -001 PRINTED CIRCUIT BOARD" at 21796.33,-1268.53 h100
  text "PARTS LIST FILE NAME:" at 21800,-1525 h66.53
  text "PROPRIETARY NOTICE" at 22950,-1725 h95.04
  text "THIS DATA AND INFORMATION DISCLOSED IS PROPRIETARY DATA OF" at 21784.45,-1839.01 h66.53
  text ".CustomerName" at 23844.45,-1839.01 h66.53
  text "NEITHER THIS DATA NOR THE DATA CONTAINED HEREIN SHALL BE REPRODUCED, USED OR DISCLOSED" at 21784.45,-1919.01 h66.53
  text "TO OTHERS WITHOUT THE WRITTEN AUTHORIZATION OF" at 21784.45,-1999.01 h66.53
  text ".CustomerName" at 23484.45,-1999.01 h66.53
  text "A.1" at -6028.74,-2047.24 h150
  text "Preliminary Revision" at -5578.74,-2047.24 h150
  text "XX/XX/XXXX" at -3023.74,-2047.24 h150
  text "XXX" at -2078.74,-2047.24 h150
  text "ENGINEER:" at 21754.45,-2099.01 h75
  text ".PCBDesigner" at 22244.45,-2163.94 h100
  text "DATE:" at 21754.45,-2274.01 h75
  text ".PCBDrawingDate" at 22244.45,-2313.94 h100
  text ".CustomerName" at 23604.45,-2359.01 h200
  text "REVIEWER:" at 21754.45,-2429.01 h75
  text "REV." at -6128.74,-2447.24 h180
  text "DESCRIPTION" at -4828.74,-2447.24 h180
  text "AUTHOR" at -2128.74,-2447.24 h180
  text "DATE" at -2948.74,-2472.24 h180
  text ".PCBReviewer" at 22244.45,-2479.01 h100
  text "DATE:" at 21754.45,-2599.01 h75
  text "S/N:" at 23434.45,-2599.01 h75
  text ".PCBReviewDate" at 22244.45,-2639.01 h100
  text ".PCBPartNumber" at 23744.45,-2639.01 h100
  text "MODEL:" at 21750,-2750 h66.53
  text "+" at 20781.17,-2786.79 h40
  text ".Project" at 22244.45,-2801.77 h100
  text "SIZE" at 19643.5,-2805.27 h40
  text "TOLERANCES:" at 19890,-2805.27 h40
  text ".XX= _" at 20556.17,-2811.79 h40
  text ".01" at 20906.17,-2811.79 h40
  text "SEE CHART" at 21201.17,-2846.79 h40
  text "TITLE:" at 21750,-2925 h66.53
  text "DWG NO:" at 23450,-2925 h66.53
  text "REV:" at 24900,-2925 h66.53
  text "+" at 20781.17,-2936.79 h40
  text ".XXX= _" at 20506.17,-2961.79 h40
  text ".005" at 20881.17,-2961.79 h40
  text "FOR HOLE" at 21226.17,-2971.79 h40
  text ".Title1" at 22250.02,-2979.01 h100
  text "D" at 19668.5,-3055.27 h125
  text ".Revision" at 24914.45,-3059.01 h100
  text "REVISION HISTORY" at -6024.41,-3063.78 h500
  text ".Title2" at 22250.02,-3076.77 h100
  text "+" at 20781.17,-3086.79 h40
  text "TO QUERY PLEASE CONTACT:" at -1318.9,-3095.67 h250
  text "TOLERANCE" at 21201.17,-3096.79 h40
  text ".PCBDesignerContact" at 2200,-3100 h250
  text ".XXXX= _" at 20456.17,-3111.79 h40
  text ".0005" at 20876.17,-3111.79 h40
  text ".Title3" at 22250.02,-3171.77 h100
  text "CAGE" at 23450,-3200 h66.53
  text "SHEET" at 24200,-3250 h95.04
  text "O" at 24659.97,-3249.87 h95.04
  text "F" at 24728.56,-3249.87 h95.04
  text "SCALE:" at 20418.5,-3265.27 h40
  text "1 : 1" at 20892.5,-3269.27 h75
  text "CODE" at 23450,-3275 h66.53
  text "NOTE: Sheet 1 contains original signatures only." at 21755,-3381.77 h100
  text "1" at -4618,-3485 h70
  text "2" at -623,-3485 h70
  text "3" at 3372,-3485 h70
  text "4" at 7373.01,-3485 h70
  text "5" at 11371.34,-3485 h70
  text "6" at 15369.68,-3485 h70
  text "7" at 19371.34,-3485 h70
  text "8" at 23366.34,-3485 h70
Fab Dwg:
  lines w15: 18210.24,-740.95 18210.24,3304.72 18210.24,16100 ; 18210.24,5275 25100,5275 ; 18210.24,11444.29 25075,11444.29 ; 18214.45,15317.72 25089.45,15317.72 ; 18224.61,12034.84 25075,12034.84 ; 20004.01,14892.72 24514.45,14892.72 ; 20493.7,12911.02 22186.61,12911.02 ; 20611.81,14092.13 22147.24,14092.13 ; 21211.81,14492.13 22747.24,14492.13 ; 21823.82,12267.32 22296.26,12267.32 ; 21825,12550 22700,12550 ; 22462.2,13225.98 24115.75,13225.98 ; 22462.2,13462.2 24115.75,13462.2 ; 22462.2,13698.42 24115.75,13698.42 ; 22619.68,14092.13 24155.12,14092.13
  text "PCB MANUFACTURING INFORMATION" at 18367.72,15509.45 h236.22
  text "BOARD TYPE:" at 18446.46,14918.9 h250
  text ".BoardType" at 20214.45,14917.72 h250
  text "MULTILAYER WITH SMT:" at 18446.46,14525.2 h250
  text ".LayerCount" at 21264.45,14517.72 h250
  text "BOARD SIZE:" at 18446.46,14131.5 h250
  text ".XDimension" at 20864.45,14117.72 h250
  text ".YDimension" at 22864.45,14117.72 h250
  text "X" at 22344.09,14092.13 h250
  text "TECHNOLOGY:" at 18446.46,13737.79 h250
  text "TRACK WIDTH(min):" at 20146.26,13737.79 h250
  text ".TrackWidth" at 22664.45,13717.72 h250
  text "HOLE SIZE (min):" at 20481.84,13500 h250
  text ".HoleSize" at 22664.45,13492.72 h250
  text "PAD HEIGHT(min):" at 20344.51,13275 h250
  text ".PadHeight" at 22664.45,13242.72 h250
  text "MIN CLEARANCE:" at 18446.46,12950.39 h250
  text ".MinClearance" at 20714.45,12942.72 h250
  text "(sq mm)" at 22775,12600 h250
  text ".FingerArea" at 21925,12575 h250
  text "GOLD FINGERS: AREA/FINGER:" at 18446.46,12556.69 h250
  text "QTY:" at 21312.01,12306.69 h250
  text ".FingerQty" at 21989.45,12292.72 h250
  text "FABRICATION INFORMATION" at 18618.31,11641.14 h275.59
  text "1) MATERIAL:" at 18425,11075 h250
  text ".PCBMaterial" at 20039.45,11067.72 h250
  text "DIELECTRIC CONSTANT:" at 18625,10850 h250
  text ".DielectricConstant" at 21479.45,10847.72 h250
  text "BOARD THICKNESS:" at 18625,10625 h250
  text ".PCBThickness" at 20975,10625 h250
  text "2) SOLDER RESIST / MASK TYPE:" at 18425,10350 h250
  text ".MaskType" at 22109,10346 h250
  text "COLOUR:" at 18625,10125 h250
  text ".MaskColor" at 19725,10125 h250
  text "REGISTRATION - SOLDER MASK MUST NOT" at 18625,9900 h250
  text "CONTAMINATE SURFACE MOUNT COMPONENT PADS" at 18625,9675 h250
  text "3) SCREEN / PRINT OVERLAY COLOUR:" at 18425,9425 h250
  text ".SilkColor" at 22775,9425 h250
  text "4) FINISH:" at 18425,9125 h250
  text ".TrackFinish" at 19600,9125 h250
  text "SHALL BE MIN .000002\" THICK GOLD" at 18625,8900 h250
  text "OVER .0001\" THICK NICKEL." at 18625,8675 h250
  text "5) VIA IN PAD:" at 18425,8400 h250
  text ".ViaInPad" at 20100,8400 h250
  text "PLUGGED VIAS:" at 18625,8175 h250
  text ".PluggedVia" at 20475,8175 h250
  text "IMPEDANCE CONSTRAINTS:" at 18625,7950 h250
  text ".ImpedanceConstraints" at 21775,7950 h250
  text "6) STANDARDS CONFORMANCE -" at 18425,7675 h250
  text "PCB MUST MEET OR EXCEED THE REQUIREMENTS OF:" at 18625,7450 h250
  text "IPC Class Conformance:" at 18625,7225 h250
  text ".IPCclass" at 21150,7200 h250
  text "UL APPROVAL:" at 18625,7000 h250
  text ".ulApproval" at 20464.45,6992.72 h250
  text "RoHS Compliant:" at 18625,6775 h250
  text ".RoHSCompliant" at 20450,6775 h250
  text "7) DRAWING VIEWED FROM TOP SIDE COPPER" at 18425,6500 h250
  text "8) FEATURE GROWTH OR REDUCTION TO BE NO GREATER" at 18425,6200 h250
  text "THAN +/-.002\" OF GERBER DATA. FABRICATOR SHALL" at 18625,5975 h250
  text "ADJUST FOR MFG PROCESS" at 18625,5750 h250
  text "Enter Layer Stackup Here by performing the following:" at 18275,5025 h250
  text "1. Move these instructions outside the title block" at 18500,4725 h250
  text "2. Select Design > Layer Stack Manager..." at 18499.76,4450 h250
  text "3. Select the \"Place Stackup Legend\" button" at 18500,4200 h250
  text "4. Press the TAB key and select the items to be shown in the table" at 18500,3950 h250
  text "5. Place the table in this space" at 18500,3675 h250
  text "6. Delete these instructions" at 18500,3425 h250
  text "NOTE: The table is NOT dynamic. If you make changes to" at 18300,3100 h250
  text "the stackup, you must delete the previous table and" at 19050,2850 h250
  text "regenerate the table." at 19050,2625 h250
  text "* LAYER STACKUP DIMENSIONS TO BE USED AS A GUIDE" at 18275,-350 h200
  text "ONLY, PLEASE SEE IMPEDANCE CONSTRAINTS" at 18275,-525 h200
  text "AND DESIRED THICKNESS FOR FURTHER DETAILS." at 18275,-700 h200
  text "IMPEDANCE ROUTING SHALL BE 5.5mil = 50 Ohms all internal signal layers, 5 mils = 50 Ohms all external layers." at -1223.74,-1525.39 h250
  text "Plugged Vias are denoted by the following hole sizes:" at -1223.74,-1825.39 h250
  text ".PluggedViaSizes" at 5876.26,-1850.39 h250
  text "EDGE CONNECTOR NOTES AS APPLICABLE" at -1216.73,-2115.75 h250
  text ".FabDrawingNumber" at 23550,-3075 h100
  text "1" at 24550,-3250 h100
  text "1" at 24875,-3250 h100
  text "Fabrication Drawing" at 22088.67,-3256.77 h100
Dimensions:
  text "1" at 24550,-3250 h100
  text "1" at 24875,-3250 h100
  text "Dimensional Drawing" at 22050,-3275 h100
Drill Drawing:
  text ".Legend" at 934,0 h100
  text "1" at 24550,-3250 h100
  text "1" at 24850,-3250 h100
  text "Drill Drawing" at 22225,-3275 h100

## Dimensions
26.18,1423.13 to 715.16,1423.23 on Dimensions
642.22,1496.06 to 642.22,19.68 on Dimensions